# Altium PCB 2015-08-14_11-23-54.PcbDoc
Units mm, origin at the board's own origin, x right, y up, seen from the top; angles counter-clockwise.
Board outline 96 x 96 mm, 4 copper layers (Top Layer, MidLayer1, MidLayer2, Bottom Layer); 15 components, 12 nets, 49 pads, 15 vias.
Unrouted connection lines stored in the file: 3.
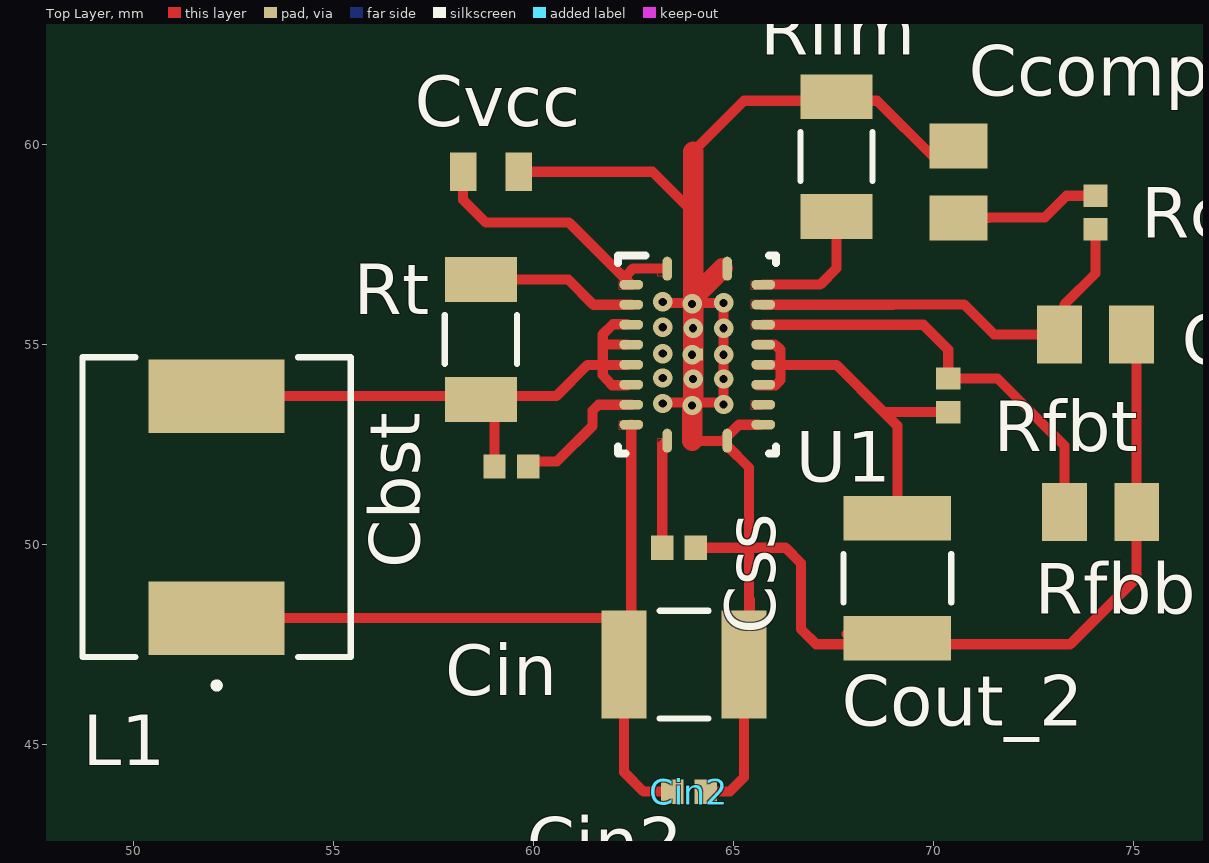
[diagram p0: Top Layer view]
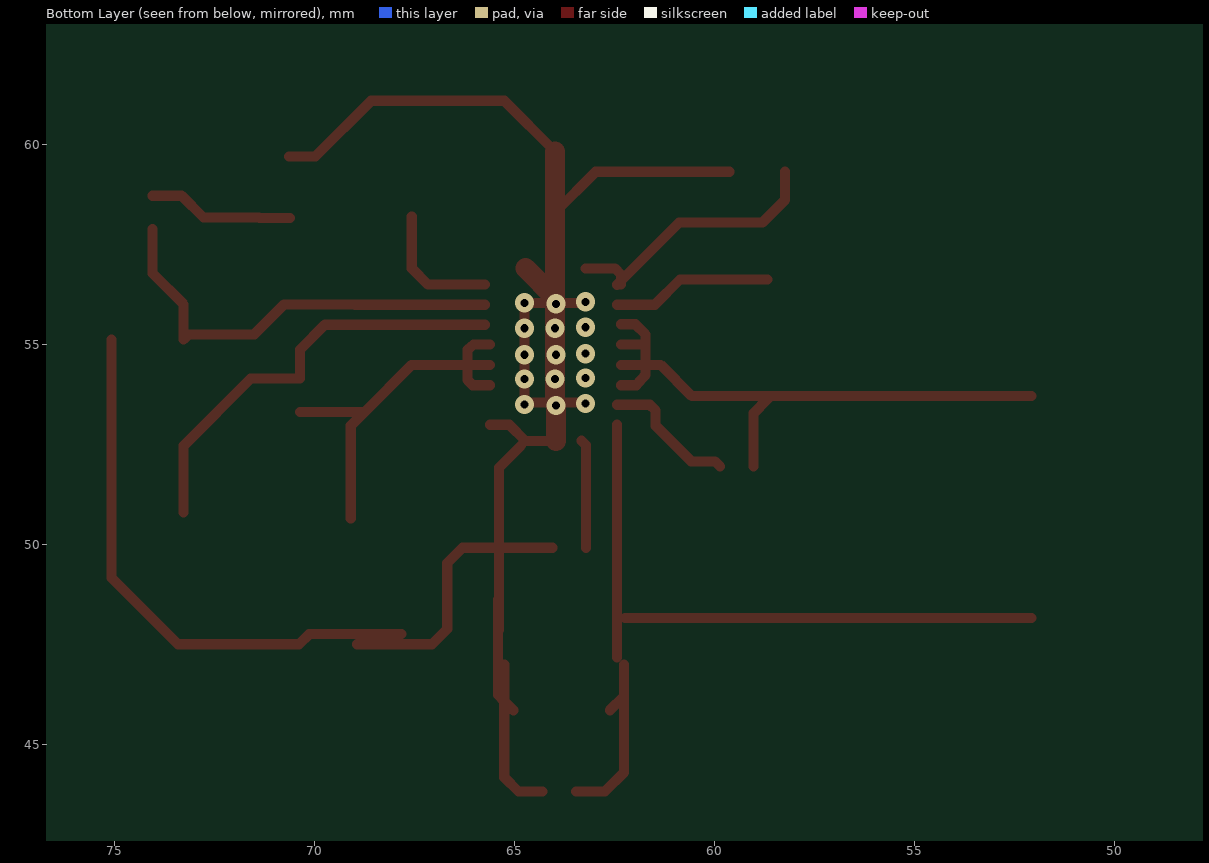
[diagram p1: Bottom Layer view, seen from below]

## Layer stack, top to bottom
Top Solder: solder mask 0.0102, Solder Resist, Dk 3.5
Top Layer: signal copper 0.0356
Dielectric1: core 0.32, FR-4, Dk 4.8
MidLayer1: signal copper 0.0356
Dielectric2: prepreg 0.32, FR-4, Dk 4.8
MidLayer2: signal copper 0.0356
Dielectric3: core 0.32, FR-4, Dk 4.8
Bottom Layer: signal copper 0.0356
Bottom Solder: solder mask 0.0102, Solder Resist, Dk 3.5

## Board outline
40,40 136,40 136,136 40,136 40,40

## Design rules (kind name [scope] priority, off if disabled: settings)
Clearance [All] p1: gap=0.254
PlaneConnect [All] p1: planeconnectstyle=Direct reliefexpansion=0.508 reliefentries=4 reliefconductorwidth=0.254 reliefairgap=0.254
PolygonConnect [All] p1: connectstyle=Direct reliefconductorwidth=0.254 reliefentries=4 polygonreliefangle="90 Angle" airgapwidth=0.254
RoomDefinition 2015-08-14_11-21-541 [InComponentClass('2015-08-14_11-21-541')] p1: confinementstyle=ConfineIn formatcopy=TRUE lockcomponents=FALSE outline 0,0 50.8,0 50.8,25.4 0,25.4
RoutingVias [All] p1: holewidth=0.711 width=1.27 viastyle="Through Hole" minholewidth=0.711 minwidth=1.27 maxholewidth=0.711 maxwidth=1.27
SolderMaskExpansion [All] p1: expansion=0.102
Width [All] p1: maxlimit=0.254 minlimit=0.254 preferedwidth=0.254
29 further rules are at their usual default settings.

## Components (designator, comment, footprint, x,y, rotation, side; value= is the part's Value field where it differs from the comment)
Cbst "C1005X5R1A104K" 1005 59.436,51.943 r180 top
Ccomp "CC0805KRX7R9BB821" 0805 70.612,59.055 r90 top
Ccomp2 "CC0805JRNPO9BN390" 0805 74.041,55.245 r0 top
Cin "GRM32ER61C476ME15L" 1210 63.754,46.99 r0 top
Cin2 "GRM155R61C104KA88D" 0402 63.881,43.815 r0 top
Cout_2 "GRM32ER61E226KE15L" 1210 69.088,49.149 r270 top
Css "GRM155R71C822KA01D" 0402 63.627,49.911 r0 top
Cvcc "C1608X5R1A105K" 1608 58.928,59.309 r0 top
L1 "SRP6540-1R5M" SRP6540 52.07,50.927 r90 top
Rcomp "CRCW040225K5FKED" 0402 74.041,58.293 r90 top
Rfbb "RR1220P-823-D" 0805 74.168,50.8 r0 top
Rfbt "CRCW0402732KFKED" 0402 70.358,53.721 r90 top
Rlim "ERJ-8ENF1053V" 1206 67.564,59.69 r90 top
Rt "ERJ-8ENF2613V" 1206 58.674,55.118 r90 top
U1 "TPS61088RHLR" RHL0020A 64.084,54.737 r0 top

## Footprints (in the part's own frame and the unit in brackets; to place one, negate y for a bottom-side part, rotate by r counter-clockwise, add the part's x,y. Pads: shape width x height; smd on the part's side, far side on the other; paste and mask are expansions set on the pad)
0402 [mil]
  rect 22x24 smd: 1(-16.5,0) 2(16.5,0)
0805 [mil]
  rect 44x57 smd: 1(-35.5,0) 2(35.5,0)
1005 [mil]
  rect 22x24 smd: 1(-16.5,0) 2(16.5,0)
1206 [mil]
  rect 44x71 smd: 1(-59,0) 2(59,0)
  silkscreen extent -24,-36 24,36
1210 [mil]
  rect 44x106 smd: 1(-59,0) 2(59,0)
  silkscreen extent -24,-53 24,53
1608 [mil]
  rect 26x38 smd: 1(-27.5,0) 2(27.5,0)
RHL0020A [mm]
  oval 0.24x0.6 smd: 1(-0.75,2.15) 10(-0.75,-2.15) 11(0.75,-2.15) 20(0.75,2.15)
  oval 0.6x0.24 smd: 2(-1.65,1.75) 3(-1.65,1.25) 4(-1.65,0.75) 5(-1.65,0.25) 6(-1.65,-0.25) 7(-1.65,-0.75) 8(-1.65,-1.25) 9(-1.65,-1.75) 12(1.65,-1.75) 13(1.65,-1.25) 14(1.65,-0.75) 15(1.65,-0.25) 16(1.65,0.25) 17(1.65,0.75) 18(1.65,1.25) 19(1.65,1.75)
  rect 0.3x0.3 smd: 21(0,0)
  silkscreen extent -1.98,-2.47 1.98,2.47
SRP6540 [mil]
  rect 72.5x134 smd: 1(-109.25,0) 2(109.25,0)
  silkscreen extent -178,-132 148,132

## Part data
Ccomp: "CC0805KRX7R9BB82"
Ccomp2: "CC0805JRNPO9BN39"
Cin: "GRM32ER61C476ME1"
Cin2: "GRM155R61C104KA8"
Cout_2: "GRM32ER61E226KE1"
Css: "GRM155R71C822KA0"
L1: "Unknown"

## Via types
v1: diameter 0.483/0.483/0.483/0.483 (per signal layer), hole 0.203, Top Layer to Bottom Layer, 15 vias

## Nets (pads, with @x,y where several pads share a name; then routed paths per layer and width w, separated by ;. In a path a pad name is that pad's centre, name@x,y a point inside that pad or via, vN(x,y) a via of type N, cw(c..) or ccw(c..) an arc to the next point about the centre after c; other vN are vias at no path point)
GND: Ccomp2.2 Ccomp.2 Cin2.2 Cin.2 Cout_2.2 Css.2 Cvcc.2 Rfbb.2 Rlim.2 U1.11 U1.12 U1.20 U1.21 | length 60.7
  Top Layer w0.254: Cvcc.2 62.967,59.309 63.983,58.293 ; v1@63.246,53.543 63.983,53.543 v1@64.694,53.543 ; v1@63.246,56.032 63.983,56.032 v1(64.745,56.032) v1(64.745,55.397) v1(64.745,54.737) v1(64.745,54.127) v1(64.745,53.492) ; 63.957,52.578 64.719,52.578 65.126,52.984 U1.12@65.608,52.984 ; U1.21@63.97,54.686 U1.21@63.97,54.762 ; 63.983,59.817 65.253,61.087 68.58,61.087 69.977,59.69 Ccomp.2@70.625,59.69 ; Css.2 65.38,49.911 ; Cin2.2 64.897,43.815 65.253,44.171 Cin.2@65.253,46.076 ; U1.11@64.834,52.463 65.38,51.918 65.38,49.911 ; Cin.2@65.024,45.847 Cin.2@65.253,46.076 ; Cin.2 Cin.2@65.253,46.076 ; Cin.2@65.38,47.854 65.38,49.911 ; 65.405,48.616 65.405,46.228 Cin.2@65.253,46.076 ; Cout_2.2@67.818,47.752 70.129,47.752 70.383,47.498 73.406,47.498 75.07,49.162 Rfbb.2 Ccomp2.2@75.07,55.118 ; Cout_2.2@68.936,47.498 67.056,47.498 66.675,47.879 66.675,49.53 66.294,49.911 65.38,49.911
  Top Layer w0.508: 63.957,52.578 v1(63.957,53.467) 63.983,53.492 63.983,53.543 v1(63.983,54.127) v1(63.983,55.397) 63.983,56.032 v1@63.983,56.159 ; 63.983,59.817 63.983,58.293 v1@63.983,56.159 ; U1.20@64.719,56.896 v1@63.983,56.159
  other v1: 63.221,53.518 63.221,54.153 63.957,54.737 63.221,54.762 63.221,55.423 63.957,56.007 63.221,56.058
NetCbst_1: Cbst.1 U1.8 | length 3.4
  Top Layer w0.254: Cbst.1 59.982,52.07 60.579,52.07 61.468,52.959 61.468,53.34 61.615,53.487 U1.8
NetCbst_2: Cbst.2 L1.2 Rt.1 U1.4 U1.5 U1.6 U1.7 | length 15.6
  Top Layer w0.254: L1.2 Rt.1@58.591,53.702 ; Cbst.2 59.017,53.276 Rt.1 Rt.1@58.591,53.702 ; U1.7@62.332,53.975 61.951,53.975 61.722,54.229 61.722,54.483 ; U1.6@62.332,54.483 61.722,54.483 ; U1.5@62.332,54.991 61.722,54.991 ; U1.4@62.332,55.499 61.976,55.499 61.722,55.245 61.722,54.991 ; Rt.1@58.591,53.702 60.56,53.702 61.341,54.483 61.722,54.483 ; 61.722,54.483 61.722,54.991
NetCcomp2_1: Ccomp2.1 Rcomp.1 U1.18 | length 11
  Top Layer w0.254: U1.18 68.981,55.987 ; 68.981,55.995 70.751,55.995 71.501,55.245 Ccomp2.1 73.266,55.118 73.266,55.994 74.041,56.769 Rcomp.1
NetCcomp_1: Ccomp.1 Rcomp.2 | length 3.7
  Top Layer w0.254: Ccomp.1 71.374,58.153 71.387,58.166 72.771,58.166 73.317,58.712 Rcomp.2
NetCss_1: Css.1 U1.10 | length 2.7
  Top Layer w0.254: Css.1 63.208,52.473 U1.10@63.322,52.587
NetCvcc_1: Cvcc.1 U1.1 U1.2 | length 7
  Top Layer w0.254: Cvcc.1 58.229,58.61 58.801,58.039 60.882,58.039 U1.2@62.332,56.59 ; U1.2@62.332,56.49 U1.2@62.332,56.59 ; U1.2 U1.2@62.332,56.59 ; U1.1@63.221,56.896 62.484,56.896 62.332,56.744 U1.2@62.332,56.59
NetRfbb_1: Rfbb.1 Rfbt.2 U1.17 | length 10.9
  Top Layer w0.254: U1.17 69.735,55.487 70.358,54.864 Rfbt.2 71.59,54.14 73.266,52.464 Rfbb.1
NetRlim_1: Rlim.1 U1.19 | length 3.3
  Top Layer w0.254: U1.19 67.156,56.488 67.564,56.896 Rlim.1
NetRt_2: Rt.2 U1.3 | length 4
  Top Layer w0.254: Rt.2 60.858,56.617 61.488,55.987 U1.3
VIN: Cin2.1 Cin.1 L1.1 U1.9 | length 20.6
  Top Layer w0.254: L1.1 Cin.1@62.236,48.152 ; Cin.1 Cin.1@62.255,46.203 ; Cin.1@62.434,47.169 U1.9 ; Cin.1@62.611,45.847 Cin.1@62.255,46.203 ; Cin2.1 62.738,43.815 62.255,44.298 Cin.1@62.255,46.203
VOUT: Cout_2.1 Rfbt.1 U1.14 U1.15 U1.16 | length 10
  Top Layer w0.254: U1.14@65.608,53.975 66.04,53.975 66.167,54.102 66.167,54.483 ; U1.15@65.608,54.483 66.167,54.483 ; U1.16@65.608,54.991 66.015,54.991 66.167,54.864 66.167,54.483 ; Cout_2.1 69.088,52.959 68.745,53.302 ; Rfbt.1 68.745,53.302 ; 66.167,54.483 67.564,54.483 68.745,53.302
pads on no net: U1.13

## Polygon pours and split planes (outlines as drawn)
no net on Top Paste "Top Layer-No Net" (solid, remove dead copper): 63.694,52.812 64.474,52.812 64.474,53.109 63.694,53.109
no net on Top Paste "Top Layer-No Net" (solid, remove dead copper): 63.694,56.365 64.474,56.365 64.474,56.662 63.694,56.662
no net on Top Paste "Top Layer-No Net" (solid, remove dead copper): 64.184,54.837 65.101,54.837 65.101,56.165 64.184,56.165
no net on Top Paste "Top Layer-No Net" (solid, remove dead copper): 63.984,56.165 63.067,56.165 63.067,54.837 63.984,54.837
no net on Top Paste "Top Layer-No Net" (solid, remove dead copper): 63.984,54.637 63.067,54.637 63.067,53.309 63.984,53.309
no net on Top Paste "Top Layer-No Net" (solid, remove dead copper): 64.184,53.309 65.101,53.309 65.101,54.637 64.184,54.637
GND on Top Layer "Top Layer-No Net" (solid, pour order 16): 65.43,52.857 65.43,53.086 65.684,53.086 65.684,52.857
NetCvcc_1 on Top Layer "Top Layer-No Net" (solid, pour order 10): 62.128,56.363 62.128,56.591 62.382,56.591 62.382,56.363
NetRt_2 on Top Layer "Top Layer-No Net" (solid, pour order 9): 62.128,55.88 62.128,56.109 62.382,56.109 62.382,55.88
NetCbst_1 on Top Layer "Top Layer-No Net" (solid, pour order 8): 62.128,53.365 62.128,53.594 62.382,53.594 62.382,53.365
VIN on Top Layer "Top Layer-No Net" (solid, pour order 7): 62.128,52.857 62.128,53.086 62.382,53.086 62.382,52.857
NetCss_1 on Top Layer "Top Layer-No Net" (solid, pour order 6): 63.094,52.426 63.094,52.654 63.322,52.654 63.322,52.426
no net on Top Layer "Top Layer-No Net" (solid, pour order 5): 65.43,53.365 65.43,53.594 65.684,53.594 65.684,53.365
NetRfbb_1 on Top Layer "Top Layer-No Net" (solid, pour order 4): 65.43,55.372 65.43,55.601 65.684,55.601 65.684,55.372
NetCcomp2_1 on Top Layer "Top Layer-No Net" (solid, pour order 3): 65.43,55.88 65.43,56.109 65.684,56.109 65.684,55.88
NetRlim_1 on Top Layer "Top Layer-No Net" (solid, pour order 2): 65.43,56.363 65.43,56.591 65.684,56.591 65.684,56.363
NetCvcc_1 on Top Layer "Top Layer-No Net" (solid, pour order 1): 63.094,56.693 63.094,56.947 63.322,56.947 63.322,56.693

## Other copper
Multi-Layer:
  lines w0.025: 25.4,25.4 104.14,25.4 104.14,83.82 25.4,83.82 25.4,25.4

## Silkscreen, mask and mechanical layers (free items; w line width, h text height)
Top Overlay:
  text "Design Rules: Min Clearance: 10mil" at 48.285,80.823 h1.02
  text "Min Track Width: 10mil" at 61.951,78.791 h1.02

## Text inside footprints (layer, text, board x,y; h text height)
U1: Top Overlay "Designator97" at 72.517,41.021 h1.27